# Altium PCB 打样.PcbDoc
Units mil, origin at the board's own origin, x right, y up, seen from the top; angles counter-clockwise.
Board outline 1675 x 2045 mil, 2 copper layers (Top Layer, Bottom Layer); 81 components, 0 nets, 333 pads, 96 vias.
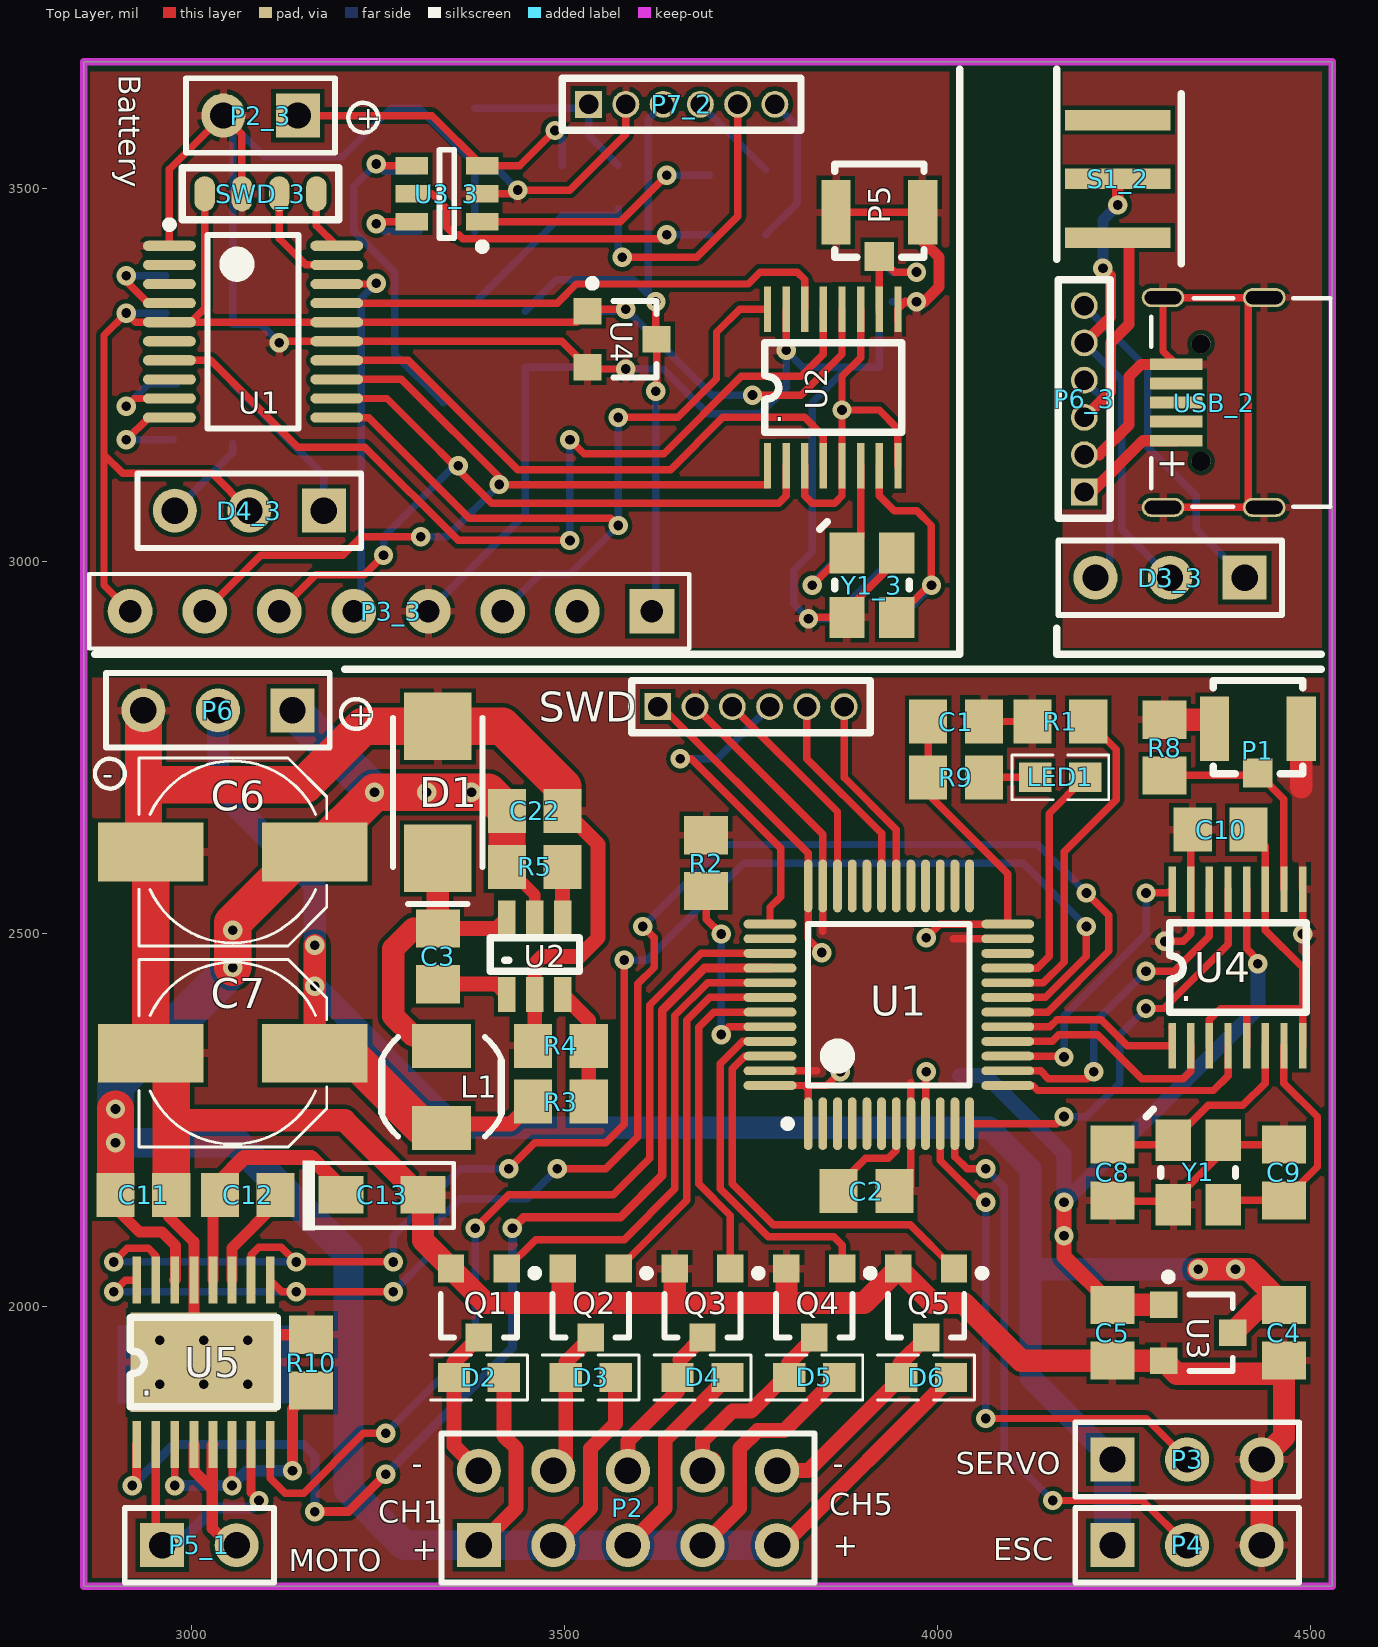
[diagram p0: Top Layer view]
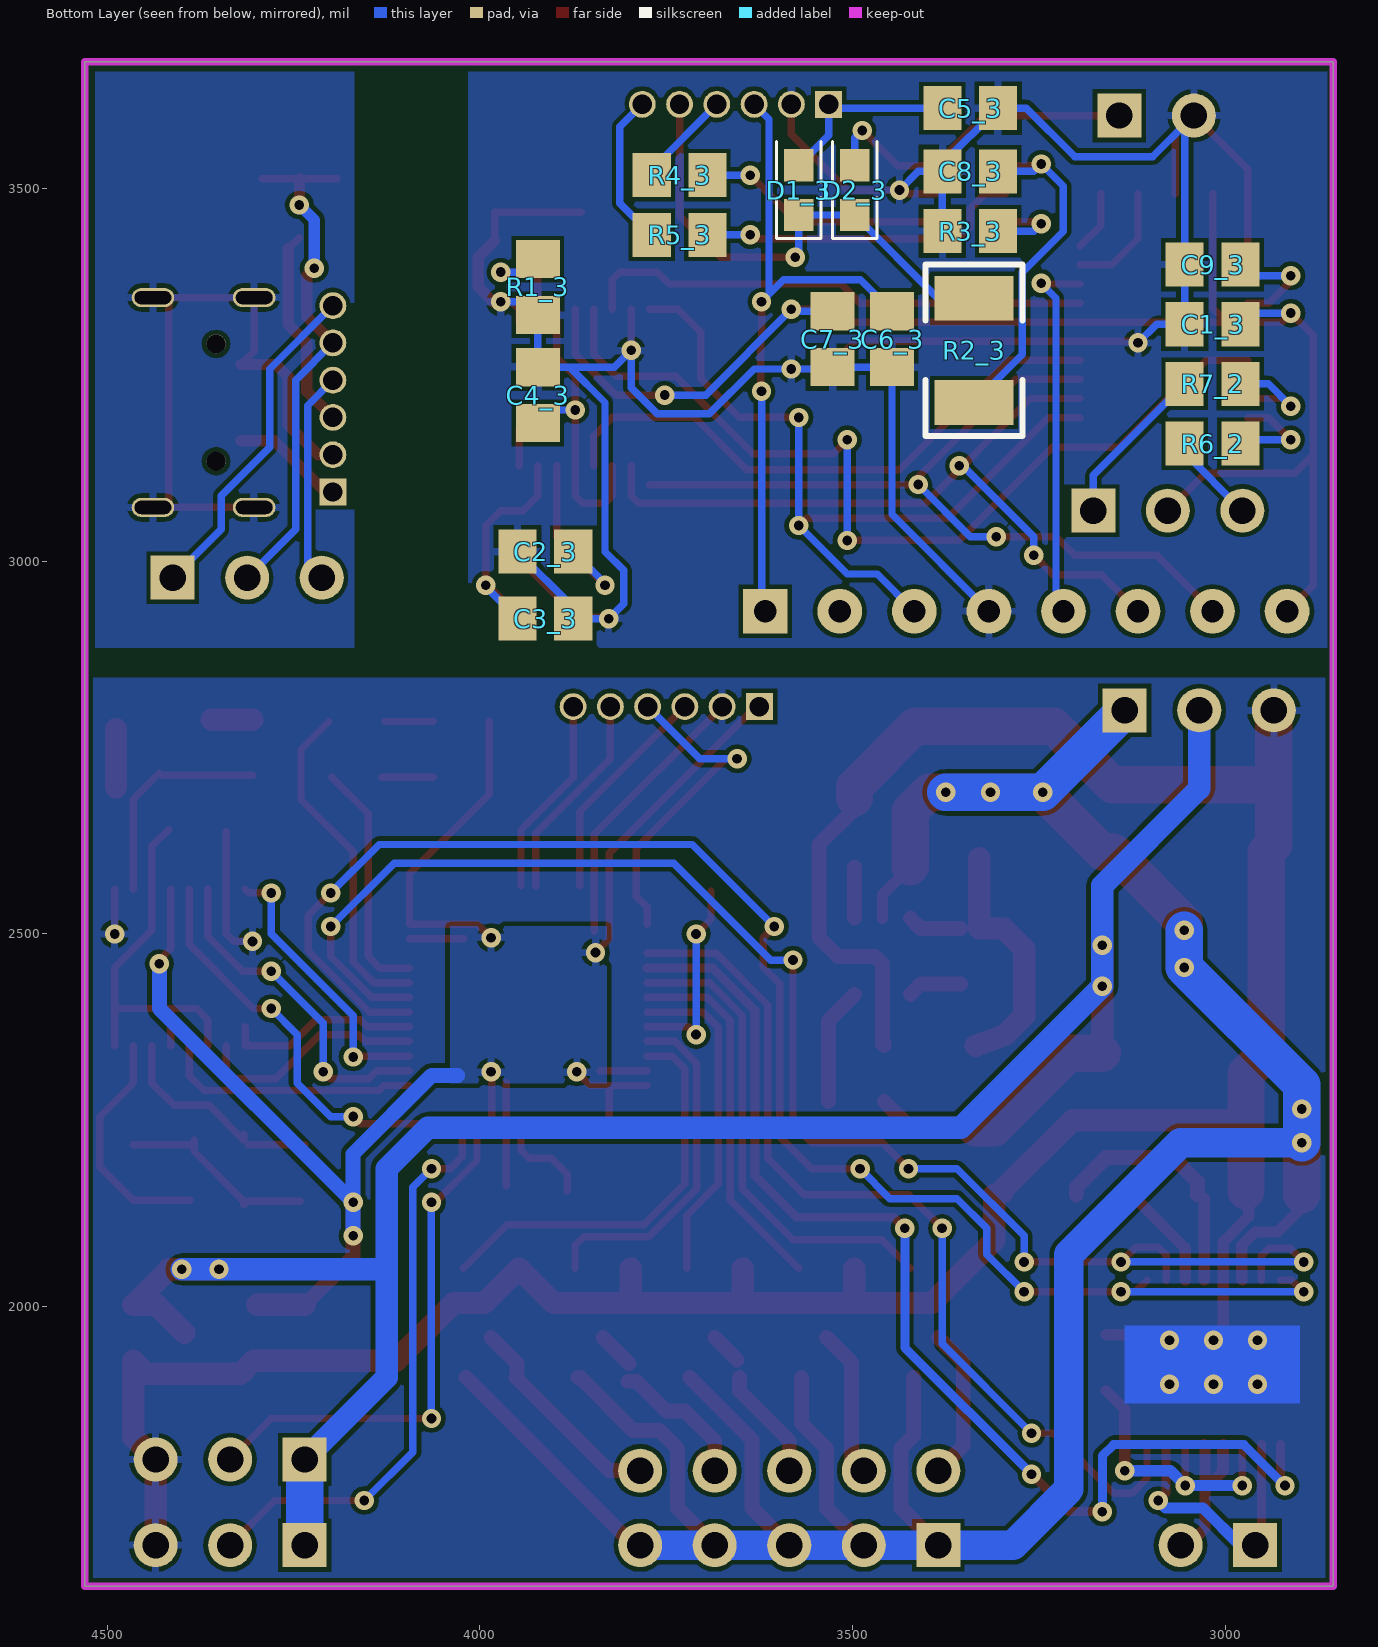
[diagram p1: Bottom Layer view, seen from below]

## Layer stack, top to bottom
Top Layer: signal copper 1.4
Dielectric: dielectric 12.6, FR-4, Dk 4.8
Bottom Layer: signal copper 1.4

## Board outline
2855,3670 4530,3670 4530,1625 2855,1625

## Design rules (kind name [scope] priority, off if disabled: settings)
Clearance [All] p1: gap=6
ComponentClearance [All] p1: gap=6 collisioncheckmode=3 verticalgap=6 showdistances=FALSE
PolygonConnect [All] p1: connectstyle=Relief reliefconductorwidth=10 reliefentries=4 polygonreliefangle="90 Angle"
RoutingVias [All] p1: holewidth=28 width=50 viastyle="Through Hole" minholewidth=28 minwidth=50 maxholewidth=28 maxwidth=50
ShortCircuit [All] p1: allowed=TRUE
SilkToSilkClearance [All] p1 off: silktosilkclearance=10
SilkscreenOverComponentPads [All] p1 off: minsilkscreentomaskgap=10
SolderMaskExpansion [All] p1: expansion=4
Width [All] p1: maxlimit=50 minlimit=6 preferedwidth=10 minimp=50.000000 maximp=50.000000 favimp=50.000000
24 further rules are at their usual default settings.

## Components (designator, comment, footprint, x,y, rotation, side; value= is the part's Value field where it differs from the comment)
C1 "106" 0805-2 4025,2785 r180 top
C1_3 "Cap" 0805-2 3017.16,3317.89 r0 bottom (schematic designator C1)
C2 "Cap" 0805-2 3905,2155 r0 top
C2_3 "Cap" 0805-2 3912.16,3012.89 r180 bottom (schematic designator C2)
C3 "103" 0805-2 3330,2470 r90 top
C3_3 "Cap" 0805-2 3912.16,2922.89 r0 bottom (schematic designator C3)
C4 "Cap" 0805-2 4465,1965 r270 top
C4_3 "Cap" 0805-2 3922.16,3222.89 r270 bottom (schematic designator C4)
C5 "Cap" 0805-2 4235,1965 r270 top
C5_3 "Cap" 0805-2 3342.16,3607.89 r180 bottom (schematic designator C5)
C6 "Cap Pol" C-RB-S6 3055,2610 r180 top
C6_3 "Cap" 0805-2 3447.16,3297.89 r270 bottom (schematic designator C6)
C7 "Cap Pol" C-RB-S6 3055,2340 r180 top
C7_3 "Cap" 0805-2 3527.16,3297.89 r270 bottom (schematic designator C7)
C8 "Cap" 0805-2 4235,2180 r90 top
C8_3 "Cap" 0805-2 3342.16,3522.89 r0 bottom (schematic designator C8)
C9 "Cap" 0805-2 4465,2180 r270 top
C9_3 "Cap" 0805-2 3017.16,3397.89 r0 bottom (schematic designator C9)
C10 "Cap" 0805-2 4380,2640 r0 top
C11 "Cap" 0805-2 2935,2150 r180 top
C12 "Cap" 0805-2 3075,2150 r0 top
C13 "Cap Pol" CAP-3216 3255,2150 r0 top
C22 "104" 0805-2 3460,2665 r180 top
D1 "D-Schottky" DIODE-SMA 3330,2690 r270 top
D1_3 "S4" SOD523 3572.16,3497.89 r270 bottom (schematic designator D1)
D2 "Diode" SOD523 3385,1905 r0 top
D2_3 "S4" SOD523 3497.16,3497.89 r270 bottom (schematic designator D2)
D3 "Diode" SOD523 3535,1905 r0 top
D3_3 "LED1" HDR3X1_A 4412.16,2977.89 r180 top (schematic designator D3)
D4 "Diode" SOD523 3685,1905 r0 top
D4_3 "LED1" HDR3X1_A 3177.16,3067.89 r180 top (schematic designator D4)
D5 "Diode" SOD523 3835,1905 r0 top
D6 "Diode" SOD523 3985,1905 r0 top
L1 "Inductor" l-SMD-4 3335,2295 r270 top
LED1 "red" 0603-1 4165,2710 r0 top
P1 "IPEX" U.FL-R-SMT 4430,2775 r0 top
P2 "Header 5X2" HDR5X2_A1 3385,1680 r0 top
P2_3 "Battery" HDR1X2 3142.16,3597.89 r180 top (schematic designator P2)
P3 "SERVO" HDR3X1_A 4235,1795 r0 top
P3_3 "PS2_Controller" HDR8X1_A 3217.16,2932.89 r180 top (schematic designator P3)
P4 "ESC" HDR3X1_A 4235,1680 r0 top
P5 "IPEX" U.FL-R-SMT 3922.16,3467.89 r0 top
P5_1 "Header 2" HDR2X1_A 2960,1680 r0 top (schematic designator P5)
P6 "Batter" HDR3X1_A 3135,2800 r180 top
P6_3 "Header 6" HDR6*1*1.27 4197.16,3217.89 r90 top (schematic designator P6)
P7_2 "Header 6" HDR6*1*1.27 3657.16,3612.89 r0 top (schematic designator P7)
Q1 "AO3400" SOT-23-3L 3385,2005 r180 top
Q2 "AO3400" SOT-23-3L 3535,2005 r180 top
Q3 "AO3400" SOT-23-3L 3685,2005 r180 top
Q4 "AO3400" SOT-23-3L 3835,2005 r180 top
Q5 "AO3400" SOT-23-3L 3985,2005 r180 top
R1 "Res1" 0805-2 4165,2785 r180 top
R1_3 "Res1" 0805-2 3922.16,3367.89 r90 bottom (schematic designator R1)
R2 "Res1" 0805-2 3690,2595 r270 top
R2_3 "Res1" 1210 3337.16,3282.89 r90 bottom (schematic designator R2)
R3 "Res1" 0805-2 3495,2275 r0 top
R3_3 "Res1" 0805-2 3342.16,3442.89 r180 bottom (schematic designator R3)
R4 "Res1" 0805-2 3495,2350 r180 top
R4_3 "Res1" 0805-2 3732.16,3517.89 r0 bottom (schematic designator R4)
R5 "Res1" 0805-2 3460,2590 r0 top
R5_3 "Res1" 0805-2 3732.16,3437.89 r0 bottom (schematic designator R5)
R6_2 "Res1" 0805-2 3017.16,3157.89 r0 bottom (schematic designator R6)
R7_2 "Res1" 0805-2 3017.16,3237.89 r0 bottom (schematic designator R7)
R8 "Res1" 0805-2 4305,2750 r270 top
R9 "Res1" 0805-2 4025,2710 r180 top
R10 "Res1" 0805-2 3160,1925 r90 top
S1_2 "SW-SPDT" SWITCH_A4 4327.16,3512.89 r270 top (schematic designator S1)
SWD "Header 6" HDR6*1*1.27 3750,2805 r0 top
SWD_3 "Header 4" HDR4X1X1.27 3092.16,3492.89 r0 top (schematic designator SWD)
U1 "STM32F103C8T6" STM-LQFP48_N 3935,2405 r90 top
U1 "STM32F030F4P6" STM-TSSOP20_N 3082.16,3307.89 r0 top
U2 "MP2359" TSOT23-6 3460,2470 r0 top
U2 "LT8920" "SSOP-16 LT8920" 3862.16,3232.89 r0 top
U3 "662K" SOT-23 4350,1965 r270 top
U3_3 "TP4057" SOT23-6 3342.16,3492.89 r180 top (schematic designator U3)
U4 "LT8920" "SSOP-16 LT8920" 4405,2455 r0 top
U4 "662K" SOT-23 3577.16,3297.89 r270 top
U5 "DRV8833PWP" "HTSSOP-16 DRV8833" 3015.94,1925.47 r0 top
USB_2 "microusb" MICROUSB_1 4527.16,3212.89 r90 top (schematic designator USB)
Y1 "12M" XTAL_3225 4350,2180 r270 top
Y1_3 "12M" XTAL_3225 3912.16,2967.89 r270 top (schematic designator Y1)

## Footprints (in the part's own frame and the unit in brackets; to place one, negate y for a bottom-side part, rotate by r counter-clockwise, add the part's x,y. Pads: shape width x height; smd on the part's side, far side on the other; paste and mask are expansions set on the pad)
0603-1 [mm] "贴?"
  rect 1.1x1 smd: 1(-0.85,0) 2(0.85,0)
  silkscreen extent -1.65,-0.76 1.65,0.76, body extent -1.14,-0.38 1.14,0.38, height 1
0805-2 [mm] "贴?"
  rect 1.3x1.5 smd: 1(-0.95,0) 2(0.95,0)
1210 [mil]
  rect 60x106.3 smd: 1(-70,0) 2(70,0)
  silkscreen extent -115,-65 115,65, body extent -65,-50 65,50, height 39
C-RB-S6 [mm]
  rect 3.6x2 smd: 1(-2.794,0) 2(2.794,0)
  silkscreen extent -3.2,-3.2 3.2,3.2
CAP-3216 [mil]
  rect 60x50 smd: 1(-55,0) 2(55,0)
  silkscreen extent -107,-48 96,46
DIODE-SMA [mm]
  rect 2.3x2.3 smd: 1(-2.25,0) 2(2.25,0)
  silkscreen extent -2.54,-1.52 3.81,1.52, body extent -2.92,-1.4 2.92,1.4, height 3
HDR1X2 [mm] "Connector; Header; 2 Position"
  rect 1.5x1.5 hole 0.9: 1(0,0)
  round 1.5 hole 0.9: 2(2.54,0)
  silkscreen extent -1.27,-1.27 3.81,1.27
HDR2X1_A [mm] "Connector; Heade"
  rect 1.5x1.5 hole 0.9: 1(0,0)
  round 1.5 hole 0.9: 2(2.54,0)
  silkscreen extent -1.27,-1.27 3.81,1.27
HDR3X1_A [mm] "Connector; Header; 3 Posi"
  rect 1.5x1.5 hole 0.9: 1(0,0)
  round 1.5 hole 0.9: 2(2.54,0) 3(5.08,0)
  silkscreen extent -1.27,-1.27 6.35,1.27
HDR4X1X1.27 [mm]
  oval 0.7x1.2 smd: 1(-1.905,0) 2(-0.635,0) 3(0.635,0) 4(1.905,0)
  silkscreen extent -2.67,-0.89 2.67,0.89
HDR5X2_A1 [mm] "Connector; Header;"
  rect 1.5x1.5 hole 0.9: 1(0,0)
  round 1.5 hole 0.9: 2(0,2.54) 3(2.54,0) 4(2.54,2.54) 5(5.08,0) 6(5.08,2.54) 7(7.62,0) 8(7.62,2.54) 9(10.16,0) 10(10.16,2.54)
  silkscreen extent -1.27,-1.27 11.43,3.81
HDR6*1*1.27 [mil]
  rect 36x36 hole 26: 1(-125,0)
  round 36 hole 26: 2(-75,0) 3(-25,0) 4(25,0) 5(75,0) 6(125,0)
  silkscreen extent -160,-35 160,35
HDR8X1_A [mil] "2.54mm"
  rect 60x60 hole 30: 1(-400,0)
  round 60 hole 30: 2(-300,0) 3(-200,0) 4(-100,0) 5(0,0) 6(100,0) 7(200,0) 8(300,0)
  silkscreen extent -450,-50 355,50
"HTSSOP-16 DRV8833" [mm] "DRV88"
  rect 0.3x1.6 smd: 1(-2.286,-2.8) 2(-1.636,-2.8) 3(-0.986,-2.8) 4(-0.336,-2.8) 5(0.314,-2.8) 6(0.964,-2.8) 7(1.614,-2.8) 8(2.264,-2.8) 9(2.264,2.8) 10(1.614,2.8) 11(0.964,2.8) 12(0.314,2.8) 13(-0.336,2.8) 14(-0.986,2.8) 15(-1.636,2.8) 16(-2.286,2.8)
  rect 5x3.4 smd: 17(0,0)
  silkscreen extent -2.5,-1.52 2.5,1.52
l-SMD-4 [mm] "C"
  rect 1.5x2 smd: 1(-1.397,0) 2(1.397,0)
  silkscreen extent -1.69,-2.04 1.69,2.06
MICROUSB_1 [mm] "5P母座"
  rect 0.4x1.8 smd: 1(-1.3,5.25) 2(-0.65,5.25) 3(0,5.25) 4(0.65,5.25) 5(1.3,5.25)
  oval 0.65x1.45 hole 0.45 slot 1.25 at 90 deg: 6(-3.575,2.25) 6(-3.575,5.7) 6(3.575,2.25) 6(3.575,5.7)
  round 0.65 hole 0.65 unplated: ""(-2,4.4) ""(2,4.4)
  silkscreen extent -3.56,0 3.56,6.1
SOD523 [mm] "D1N5819_0603封?"
  rect 1.1x1 smd: 1(-0.85,0) 2(0.85,0)
  silkscreen extent -1.65,-0.76 1.65,0.76, body extent -1.14,-0.38 1.14,0.38, height 1
SOT23-6 [mm] "Max"
  rect 1.1x0.6 smd: 1(-1.2,0.95) 2(-1.2,0) 3(-1.2,-0.95) 4(1.2,-0.95) 5(1.2,0) 6(1.2,0.95)
  silkscreen extent -1.33,-1.5 0.25,1.92, body extent -0.87,-1.5 0.87,1.5, height 1.45
SOT-23 [mm]
  rect 0.9x0.95 smd: 1(-0.95,-1.175) 2(0.95,-1.175) 3(0,1.175)
  silkscreen extent -2.03,-1.14 1.3,1.18
SOT-23-3L [mm] "AO3400"
  rect 0.9x0.95 smd: D(0,1.175) G(-0.95,-1.175) S(0.95,-1.175)
  silkscreen extent -2.03,-1.14 1.3,1.18
"SSOP-16 LT8920" [mil]
  rect 9.84x61.02 smd: 1(-90,-105) 2(-65,-105) 3(-40,-105) 4(-15,-105) 5(10,-105) 6(35,-105) 7(60,-105) 8(85,-105) 9(85,105) 10(60,105) 11(35,105) 12(10,105) 13(-15,105) 14(-40,105) 15(-65,105) 16(-90,105)
  silkscreen extent -93,-60 90,60
STM-LQFP48_N [mm] "QFP, 48-Leads, Body 7x7mm, Pitch 0.5mm, IPC Medium Density"
  oval 1.8x0.3 smd: 1(-4.05,2.75) 2(-4.05,2.25) 3(-4.05,1.75) 4(-4.05,1.25) 5(-4.05,0.75) 6(-4.05,0.25) 7(-4.05,-0.25) 8(-4.05,-0.75) 9(-4.05,-1.25) 10(-4.05,-1.75) 11(-4.05,-2.25) 12(-4.05,-2.75) 25(4.05,-2.75) 26(4.05,-2.25) 27(4.05,-1.75) 28(4.05,-1.25) 29(4.05,-0.75) 30(4.05,-0.25) 31(4.05,0.25) 32(4.05,0.75) 33(4.05,1.25) 34(4.05,1.75) 35(4.05,2.25) 36(4.05,2.75)
  oval 0.3x1.8 smd: 13(-2.75,-4.05) 14(-2.25,-4.05) 15(-1.75,-4.05) 16(-1.25,-4.05) 17(-0.75,-4.05) 18(-0.25,-4.05) 19(0.25,-4.05) 20(0.75,-4.05) 21(1.25,-4.05) 22(1.75,-4.05) 23(2.25,-4.05) 24(2.75,-4.05) 37(2.75,4.05) 38(2.25,4.05) 39(1.75,4.05) 40(1.25,4.05) 41(0.75,4.05) 42(0.25,4.05) 43(-0.25,4.05) 44(-0.75,4.05) 45(-1.25,4.05) 46(-1.75,4.05) 47(-2.25,4.05) 48(-2.75,4.05)
  silkscreen extent -4.17,-2.75 2.75,3.57, body extent -3.5,-3.5 3.5,3.5, height 1.6
STM-TSSOP20_N [mm] "SOP, 20-Leads, Body 6.6x4.5mm, Pitch 0.65mm, IPC Medium Density"
  oval 1.8x0.35 smd: 1(-2.85,2.925) 2(-2.85,2.275) 3(-2.85,1.625) 4(-2.85,0.975) 5(-2.85,0.325) 6(-2.85,-0.325) 7(-2.85,-0.975) 8(-2.85,-1.625) 9(-2.85,-2.275) 10(-2.85,-2.925) 11(2.85,-2.925) 12(2.85,-2.275) 13(2.85,-1.625) 14(2.85,-0.975) 15(2.85,-0.325) 16(2.85,0.325) 17(2.85,0.975) 18(2.85,1.625) 19(2.85,2.275) 20(2.85,2.925)
  silkscreen extent -2.97,-3.3 1.55,3.77, body extent -2.25,-3.3 2.25,3.3, height 1.2
SWITCH_A4 [mm] "5.8*5.8m"
  rect 0.7x3.6 smd: 1(-2,-2.159) 2(0,-2.159) 3(2,-2.159)
  silkscreen extent -2.9,0 2.9,0
TSOT23-6 [mm] "MP2359"
  rect 0.6x1.2 smd: 1(-0.95,-1.3) 2(0,-1.3) 3(0.95,-1.3) 4(0.95,1.3) 5(0,1.3) 6(-0.95,1.3)
  silkscreen extent -1.52,-0.51 1.52,0.64
U.FL-R-SMT [mm] "IPEX插?"
  rect 1x1 smd: 1(0,-1.5)
  rect 1x2.2 smd: 2(-1.475,0) 3(1.475,0)
  silkscreen extent -1.52,-1.52 1.52,1.65
XTAL_3225 [mm]
  rect 1.4x1.2 smd: 1(-1.1,-0.85) 2(1.1,-0.85) 3(1.1,0.85) 4(-1.1,0.85)
  silkscreen extent -2.16,-1.78 0.13,1.27

## Part data
C1 C3 C22: library part "Cap Semi", "Capacitor (Semiconductor SIM Model)"
C1_3 C2_3 C3_3 C4_3 C5_3 C6_3 C7_3 C8_3 C9_3: "ÎÞ¼"
C2 C4 C5 C8 C9 C10 C11 C12: "无?"
C6 C7 C13: "极性"
D1: "Ð¤Ì"
D1_3 D2_3: library part Diode, "Default Diode"
D2 D3 D4 D5 D6: "二极管"
D3_3 D4_3: "˫ɫLED"
L1: "电感"
LED1: library part LED3, "Typical BLUE SiC LED"
P1 P5: "U.FL-R-SMT"
P2 P5_1 SWD_3: "接插件"
P2_3: library part "Header 2", "Header, 2-Pin"
P3 P4 P6: library part "Header 3", "接插件"
P6_3 P7_2 SWD: "接?"
Q1 Q2 Q3 Q4 Q5: library part MOSFET-N, "N-Channel MOSFET"
R1 R1_3 R2 R2_3 R3 R3_3 R4 R4_3 R5 R5_3 R6_2 R7_2 R9: "ÌùÆ"
R8: "贴?"
R10: "贴片"
S1_2: "开关"
U1: "STM32 ARM-based 32-bit MCU with 64 Kbytes Flash, 48-pin LQFP, Industrial Temperature"
U1: "ARM Cortex-M0 32-bit MCU, 16 KB Flash, 4 KB Internal RAM, 15 I/Os, 20-pin TSSOP, -40 to 85 degC, Tube"
U3_3: "l锂电?"
U5: "DRV8833_HTSSOP封装"
Y1: library part XTAL-4PIN, "ÌùÆ"
Y1_3: library part XTAL-4PIN, "贴片?"

## Via types
v1: diameter 25.98, hole 12.99, Top Layer to Bottom Layer, 53 vias
v2: diameter 25.98, hole 12.99, Top Layer to Bottom Layer, tented both sides, 37 vias
v3: diameter 25.98, hole 12.99, Top Layer to Bottom Layer, tented top, 6 vias

## Nets (pads, with @x,y where several pads share a name; then routed paths per layer and width w, separated by ;. In a path a pad name is that pad's centre, name@x,y a point inside that pad or via, vN(x,y) a via of type N, cw(c..) or ccw(c..) an arc to the next point about the centre after c; other vN are vias at no path point)
pads on no net: C1.1 C1.2 C1_3.1 C1_3.2 C2.1 C2.2 C2_3.1 C2_3.2 C3.1 C3.2 C3_3.1 C3_3.2 C4.1 C4.2 C4_3.1 C4_3.2 C5.1 C5.2 C5_3.1 C5_3.2 C6.1 C6.2 C6_3.1 C6_3.2 C7.1 C7.2 C7_3.1 C7_3.2 C8.1 C8.2 C8_3.1 C8_3.2 C9.1 C9.2 C9_3.1 C9_3.2 C10.1 C10.2 C11.1 C11.2 C12.1 C12.2 C13.1 C13.2 C22.1 C22.2 D1.1 D1.2 D1_3.1 D1_3.2 D2.1 D2.2 D2_3.1 D2_3.2 D3.1 D3.2 D3_3.1 D3_3.2 D3_3.3 D4.1 D4.2 D4_3.1 D4_3.2 D4_3.3 D5.1 D5.2 D6.1 D6.2 L1.1 L1.2 LED1.1 LED1.2 P1.1 P1.2 P1.3 P2.1 P2.2 P2.3 P2.4 P2.5 P2.6 P2.7 P2.8 P2.9 P2.10 P2_3.1 P2_3.2 P3.1 P3.2 P3.3 P3_3.1 P3_3.2 P3_3.3 P3_3.4 P3_3.5 P3_3.6 P3_3.7 P3_3.8 P4.1 P4.2 P4.3 P5.1 P5.2 P5.3 P5_1.1 P5_1.2 P6.1 P6.2 P6.3 P6_3.1 P6_3.2 P6_3.3 P6_3.4 P6_3.5 P6_3.6 P7_2.1 P7_2.2 P7_2.3 P7_2.4 P7_2.5 P7_2.6 Q1.D Q1.G Q1.S Q2.D Q2.G Q2.S Q3.D Q3.G Q3.S Q4.D Q4.G Q4.S Q5.D Q5.G Q5.S R1.1 R1.2 R1_3.1 R1_3.2 R2.1 R2.2 R2_3.1 R2_3.2 R3.1 R3.2 R3_3.1 R3_3.2 R4.1 R4.2 R4_3.1 R4_3.2 R5.1 R5.2 R5_3.1 R5_3.2 R6_2.1 R6_2.2 R7_2.1 R7_2.2 R8.1 R8.2 R9.1 R9.2 R10.1 R10.2 S1_2.1 S1_2.2 S1_2.3 SWD.1 SWD.2 SWD.3 SWD.4 SWD.5 SWD.6 SWD_3.1 SWD_3.2 SWD_3.3 SWD_3.4 U1.1 U1.2 U1.3 U1.4 U1.5 U1.6 U1.7 U1.8 U1.9 U1.10 U1.11 U1.12 U1.13 U1.14 U1.15 U1.16 U1.17 U1.18 U1.19 U1.20 U1.21 U1.22 U1.23 U1.24 U1.25 U1.26 U1.27 U1.28 U1.29 U1.30 U1.31 U1.32 U1.33 U1.34 U1.35 U1.36 U1.37 U1.38 U1.39 U1.40 U1.41 U1.42 U1.43 U1.44 U1.45 U1.46 U1.47 U1.48 U2.1 U2.2 U2.3 U2.4 U2.5 U2.6 U2.7 U2.8 U2.9 U2.10 U2.11 U2.12 U2.13 U2.14 U2.15 U2.16 U3.1 U3.2 U3.3 U3_3.1 U3_3.2 U3_3.3 U3_3.4 U3_3.5 U3_3.6 U4.1 U4.2 U4.3 U4.4 U4.5 U4.6 U4.7 U4.8 U4.9 U4.10 U4.11 U4.12 U4.13 U4.14 U4.15 U4.16 U5.1 U5.2 U5.3 U5.4 U5.5 U5.6 U5.7 U5.8 U5.9 U5.10 U5.11 U5.12 U5.13 U5.14 U5.15 U5.16 U5.17 USB_2. USB_2.1 USB_2.2 USB_2.3 USB_2.4 USB_2.5 USB_2.6 Y1.1 Y1.2 Y1.3 Y1.4 Y1_3.1 Y1_3.2 Y1_3.3 Y1_3.4
copper on no net: | length 57101
  Top Layer w10: v1(2895,2020) 2910.71,2035.71 2925.94,2035.71 ; v1(2895,2060) 2913.2,2078.2 2941.8,2078.2 2951.54,2068.46 2951.54,2035.71 ; v2(2912.16,3162.89) 2942,3192.73 2969.95,3192.73 ; v2(2912.16,3207.89) 2922.59,3218.32 2969.95,3218.32 ; v2(2912.16,3382.89) 2912.16,3375.82 2941.7,3346.28 2969.95,3346.28 ; 2917.16,2932.89 2882.16,2967.89 2882.16,3142.89 ; 2969.95,3269.5 3025.54,3269.5 3142.16,3152.89 3232.16,3152.89 3357.16,3027.89 v2(3507.16,3027.89) ; 2969.95,3423.05 2969.95,3525.69 3042.16,3597.89 3067.16,3572.89 3067.16,3492.89 ; v1(2977.13,1760) 2977.13,1815.24 ; 3017.16,2932.89 3092.16,3007.89 3202.16,3007.89 3227.16,3032.89 v2(3307.16,3032.89) ; 3017.16,3492.89 3017.16,3339.64 2998.2,3320.69 ; v1(3053.9,1760) 3053.9,1815.24 ; 3077.16,3067.89 3027.16,3117.89 2907.16,3117.89 2882.16,3142.89 ; 3079.49,2035.71 3079.49,2069.49 3090,2080 3120,2080 v1(3140,2060) v1(3270,2060) ; 3105.08,1815.24 3105.08,1769.92 3125,1750 3150,1750 3230,1830 v1(3260,1830) ; 3105.08,2035.71 3120.79,2020 v1(3140,2020) v1(3270,2020) ; 3117.16,2932.89 3166.16,2981.89 3231.16,2981.89 v2(3257.16,3007.89) ; 3117.16,3492.89 3117.16,3432.89 3152.59,3397.46 3194.36,3397.46 ; v2@3119.36,3295.09 3194.36,3295.09 3496.29,3295.09 3530.9,3260.49 ; 3142.16,3597.89 3321.8,3597.89 3389.4,3530.29 3439.56,3530.29 v2(3487.16,3577.89) ; 3167.16,3492.89 3167.16,3450.25 3194.36,3423.05 ; 3194.36,3192.73 3237.31,3192.73 3372.16,3057.89 3562.16,3057.89 v2(3572.16,3047.89) ; 3194.36,3218.32 3261.72,3218.32 3402.16,3077.89 3787.16,3077.89 3797.16,3087.89 3797.16,3127.89 ; 3194.36,3243.91 3281.13,3243.91 3422.16,3102.89 3772.16,3102.89 ; 3194.36,3269.5 3290.54,3269.5 3437.16,3122.89 3642.16,3122.89 3712.16,3192.89 3822.16,3192.89 3847.16,3167.89 3847.16,3127.89 ; 3194.36,3346.28 3489.91,3346.28 3515.51,3371.88 3746.15,3371.88 3762.16,3387.89 3812.16,3387.89 3822.16,3377.89 3822.16,3337.89 ; 3194.36,3371.87 3233.18,3371.87 ; v2@3249.76,3455.49 3294.91,3455.49 ; v2@3249.76,3530.29 3294.91,3530.29 ; 3294.91,3492.89 3322.16,3492.89 3342.16,3472.89 3342.16,3447.89 3352.16,3437.89 3357.98,3437.89 3363.19,3432.68 3631.94,3432.68 v2(3637.16,3437.89) ; v1(3380,2105) 3425,2150 3565,2150 3614,2199 3614,2404.71 3683.19,2473.9 3775.55,2473.9 ; 3389.4,3455.49 3574.76,3455.49 v2(3637.16,3517.89) ; 3389.4,3492.89 3432.16,3492.89 v2(3437.16,3497.89) 3507.16,3497.89 3582.16,3572.89 3582.16,3612.89 ; 3422.4,2051.26 3461.14,2090 3580,2090 3648,2158 3648,2390.63 3691.9,2434.53 3775.55,2434.53 ; v1(3425,2185) 3460,2220 3555,2220 3580,2245 v1(3580,2465) ; v1(3490,2185) 3555,2185 3598,2228 3598,2433 3620,2455 3620,2495 v1(3605,2510) ; v2(3507.16,3162.89) 3526.15,3143.9 3633.16,3143.9 3737.16,3247.89 3817.16,3247.89 3847.16,3277.89 3847.16,3337.89 ; 3530.9,3335.29 3516.29,3320.69 3194.36,3320.69 2998.2,3320.69 ; 3533.5,3257.89 v2(3582.16,3257.89) ; 3533.5,3337.89 v2(3582.16,3337.89) ; v2(3572.16,3192.89) 3652.16,3192.89 3703.78,3244.52 3703.78,3306.89 3734.78,3337.89 3772.16,3337.89 ; 3572.4,2051.26 3664,2142.86 3664,2384 3694.84,2414.84 3775.55,2414.84 ; v2(3577.16,3407.89) 3677.16,3407.89 3732.16,3462.89 3732.16,3612.89 ; 3622.16,3299.15 v2(3622.16,3347.89) ; v2@3623.42,3229.15 3623.42,3297.89 ; 3630,2805 3826.73,2608.27 3826.73,2564.45 3826.73,2493.27 v1(3845,2475) ; v1(3655,2735) 3670,2735 3790,2615 3790,2550 3775.55,2535.55 3775.55,2513.27 ; 3675,2805 3846.42,2633.58 3846.42,2564.45 3846.42,2503.58 ; 3690,2557.6 3690,2520 v1(3710,2500) ; v1(3710,2365) 3720.47,2375.47 3775.55,2375.47 ; 3722.4,2051.26 3722.4,2122.34 3680,2164.75 3680,2375 3700.16,2395.16 3775.55,2395.16 ; 3725,2805 3866.1,2663.9 3866.1,2564.45 ; v2(3752.16,3222.89) 3817.16,3222.89 3872.16,3277.89 3872.16,3337.89 ; 3775.55,2296.73 3821.73,2296.73 ; 3775.55,2316.42 3838.58,2316.42 ; 3775.55,2336.1 3741.8,2336.1 3725,2319.3 3725,2165 3780,2110 3963.66,2110 4022.4,2051.26 ; 3775.55,2355.79 3738.86,2355.79 3709,2325.93 3709,2158.37 3773.37,2094 3860.8,2094 3872.4,2082.4 3872.4,2051.26 ; v2(3797.16,3282.89) 3797.16,3337.89 ; 3822.16,3127.89 3822.16,3087.89 3832.16,3077.89 3862.16,3077.89 3872.16,3087.89 3872.16,3127.89 v2(3872.16,3202.89) ; 3825,2805 3825,2735 3925.16,2634.84 3925.16,2564.45 ; 3826.73,2245.55 3826.73,2291.73 3821.73,2296.73 ; v2@3828.85,2924.58 3878.69,2924.58 ; v2(3832.16,2967.89) 3875.46,3011.2 ; 3864.09,3467.89 3980.23,3467.89 3980.23,3429.82 ; v1(3870,2315) 3851.73,2296.73 3821.73,2296.73 ; 3873.69,2929.58 3940.62,2996.51 ; 3875,2805 3875,2709.84 3944.84,2640 3944.84,2564.45 ; 3882.6,2155 3882.6,2177.6 3904.12,2199.12 3934.12,2199.12 3944.84,2209.84 3944.84,2245.55 ; 3897.16,3032.89 3897.16,3127.89 ; 3897.16,3337.89 3897.16,3272.89 3872.16,3247.89 v2(3872.16,3202.89) ; 3922.16,3127.89 3922.16,3087.89 3942.16,3067.89 3972.16,3067.89 3992.16,3047.89 v2(3992.16,2967.89) ; 3922.16,3337.89 3922.16,3408.84 3943.1,3387.89 v2(3972.16,3387.89) ; 3945.62,2924.58 v2@3987.16,2966.12 ; 3947.16,3127.89 3947.16,3177.89 3922.16,3202.89 v2(3872.16,3202.89) ; 3947.16,3322.89 3947.16,3337.89 3957.16,3347.89 ; 3964.53,2162.13 3964.53,2245.55 3964.53,2300.47 ; 3984.21,2245.55 v1@3984.21,2314.21 ; v1(3985,2495) 4003.27,2513.27 4094.45,2513.27 4094.45,2580.55 3987.6,2687.4 3987.6,2710 3987.6,2785 ; 4003.9,2245.55 4003.9,2196.1 4060,2140 v1(4065,2140) ; 4021.42,2493.58 4094.45,2493.58 ; 4023.58,2245.55 4023.58,2201.42 4040,2185 v1(4065,2185) ; 4043.27,2245.55 4160.55,2245.55 v1(4170,2255) ; 4062.4,2710 4131.54,2710 ; 4062.4,2785 4127.6,2785 ; v1(4065,1850) 4280,1850 4335,1795 ; 4094.45,2296.73 4128.27,2296.73 4135,2290 4370,2290 4390,2310 4390,2350 ; 4094.45,2316.42 4138.58,2316.42 4149,2306 4201,2306 v1(4210,2315) ; 4094.45,2336.1 v1@4168.9,2336.1 ; 4094.45,2355.79 4153.92,2355.79 4163.14,2365 4215,2365 4274,2306 4330,2306 4340,2316 4340,2350 ; 4094.45,2375.47 4150.98,2375.47 4160.51,2385 4220,2385 4255,2350 4315,2350 4315,2375 4314.53,2375.47 ; 4094.45,2395.16 4148.04,2395.16 4230,2477.12 4230,2525 v1(4200,2555) ; 4094.45,2414.84 4145.1,2414.84 4200,2469.75 v1(4200,2510) ; 4094.45,2434.53 4142.15,2434.53 4170,2462.37 4170,2610 4240,2680 4240,2747.4 4202.4,2785 ; 4094.45,2454.21 4134.21,2454.21 4150,2470 4150,2661.54 4198.46,2710 ; v1(4155,1740) 4275,1740 4335,1680 ; 4192.16,3512.89 4242.16,3512.89 4292.16,3512.89 ; 4197.16,3092.89 4207.16,3092.89 ; 4235,2217.4 4310.63,2217.4 ; 4240.91,2141.69 4316.54,2141.69 ; 4242.16,3434.15 4257.16,3419.15 ; v1(4280,2400) 4304,2400 4390,2486 4390,2560 ; v1(4280,2450) 4318,2450 4365,2497 4365,2560 ; v1(4280,2555) 4310,2555 4315,2560 ; 4302.75,3072.14 4417.16,3072.14 4417.16,3353.64 4302.75,3353.64 4302.75,3281.79 4320.46,3264.07 ; v1(4305,2490) 4330,2490 4340,2500 4340,2560 4340,2637.4 ; 4305,2712.6 4426.65,2712.6 ; 4316.54,2136.69 4316.54,2141.69 ; 4316.54,2231.54 4316.54,2223.31 4363.23,2270 4410,2270 4440,2300 4440,2350 ; 4365,2350 4365,2385 4380,2400 4415,2400 ; 4383.46,2223.31 4383.46,2208.62 4316.54,2141.69 ; 4389.37,2142.6 4465,2142.6 4510,2187.6 4510,2255 4465,2300 4465,2350 ; 4389.37,2217.4 4465,2217.4 ; 4415,2350 4415,2400 ; 4415,2560 4415,2480 4430,2465 v1(4430,2460) ; 4417.4,2640 4440,2617.4 4440,2560 4440,2505 4490,2455 4490,2400 ; 4430,2715.94 4465,2680.94 4465,2560 ; 4490,2350 4490,2400 ; v1(4490,2500) 4490,2560 ; 2882.16,3142.89 2882.16,3302.89 v2(2912.16,3332.89) 2924.36,3320.69 2969.95,3320.69 2998.2,3320.69 ; 3875.46,3011.2 3878.69,3014.43 3878.69,3011.2 3875.46,3011.2 ; 4415,2400 4490,2400
  Top Layer w12: v1(2920,1760) 2925.94,1765.94 2925.94,1815.24 ; 2951.54,1815.24 2951.54,1688.46 2960,1680 ; 3079.49,1815.24 3079.49,1750.51 v1(3090,1740) ; v1(3165,1725) 3210,1725 v1(3260,1775) ; v1(3430,2105) 3445,2120 3575,2120 3631,2176 3631,2397.67 3687.54,2454.21 3775.55,2454.21 ; 3957.16,3347.89 v2(3972.16,3347.89)
  Top Layer w15: 2902.6,2137.4 2897.6,2132.4 2930,2100 2960,2100 2978.03,2081.97 2978.03,2036.61 2977.13,2035.71 ; 2972.4,2155 2968.7,2151.3 2968.7,2121 3002.72,2086.98 3002.72,1938.7 ; 3028.31,1815.24 3027.41,1814.33 3027.41,1755 ; 3028.31,2035.71 3028.31,2145.71 ; 3052.87,1962.4 3160,1962.4 ; 3053.9,2035.71 3053.9,2078.9 3112.4,2137.4 ; 3060,1670 3037.5,1692.5 3027.41,1702.59 3027.41,1755 ; v1(3135,1780) 3135,1862.6 3160,1887.6 ; 3422.6,2590 3460,2552.6 3460,2521.18 ; v2(3972.16,3347.89) 3982.16,3347.89 4002.16,3367.89 4002.16,3407.89 3980.23,3429.82 ; 4197.16,3142.89 4217.16,3142.89 4257.16,3182.89 4257.16,3247.89 4273.34,3264.07 4320.46,3264.07 ; 4197.16,3192.89 4232.16,3227.89 4232.16,3292.89 4257.16,3317.89 4257.16,3419.15 ; 4197.16,3292.89 4232.16,3327.89 4232.16,3382.89 v2(4222.16,3392.89) ; 4207.16,3092.89 4275.98,3161.71 4320.46,3161.71 ; v2(4242.16,3477.89) 4242.16,3512.89 ; 3003.62,1778.79 3003.62,1814.33 3002.72,1815.24 3002.72,1779.69 3003.62,1778.79 ; 3003.62,1778.79 3027.41,1755
  Top Layer w20: 3037.6,2150 3037.6,2167.6 3070,2200 3160,2200 3200,2160 3200,2150 ; 3295,2150 3310,2150 ; 3335,2245 3427.6,2245 3457.6,2275 ; 3355,2432.6 3408.82,2432.6 3422.6,2418.82 ; 3355,2507.4 3408.82,2507.4 3422.6,2521.18 ; 3371.54,1780 3385,1780 3351.54,1813.46 3351.54,1905 3351.54,1925.28 3385,1958.74 ; 3385,1680 3435,1730 3435,1810 3418.46,1826.54 3418.46,1905 ; 3457.6,2350 3457.6,2352.94 ; 3460,2352.4 3460,2418.82 3460,2460 3470,2470 3520,2470 3545,2495 3545,2620.15 3500.15,2665 3497.4,2665 3497.4,2682.6 ; 3485,1680 3535,1730 3535,1810 3568.46,1843.46 3568.46,1905 ; 3485,1780 3501.54,1796.54 3501.54,1905 3501.54,1925.28 3535,1958.74 ; 3497.4,2418.82 3532.4,2383.82 3532.4,2350 3532.4,2275 ; 3497.4,2521.18 3497.4,2590 ; 3585,1680 3635,1730 3635,1821.54 3718.46,1905 ; 3585,1780 3585,1820 3651.54,1886.54 3651.54,1905 ; 3655,1928.74 3685,1958.74 ; 3685,1680 3735,1730 3735,1810 3759,1834 3794.5,1834 3865.5,1905 3868.46,1905 ; 3700,1795 3685,1780 3685,1820 3725,1860 3750,1860 3790,1900 3801.54,1900 ; 3785,1680 3793.46,1680 4018.46,1905 ; 3785,1780 3826.54,1780 3950,1903.46 ; 3800,1923.74 3835,1958.74 ; 3951.54,1905 3950,1903.46 ; 3985,1958.74 3950,1923.74 3950,1903.46 ; v1(4170,2140) v1(4170,2095) 4170,2067.4 4235,2002.4
  Top Layer w30: 2972.4,2250 3205,2250 3300,2155 ; 3165,2340 v1(3165,2430) v1(3165,2485) ; 3310,2150 3310,2088.86 3347.6,2051.26 3393.86,2005 3647.6,2005 ; 3327.4,2507.4 3297.4,2507.4 3270,2480 3270,2390 3295.62,2364.38 3335,2350 ; 3330,2507.4 3330,2601.42 ; 3497.6,2007.6 3497.6,2051.26 ; 3647.6,2051.26 3647.6,2005 ; 3797.6,2007.4 3797.6,2051.26 ; 4235,2002.4 4298.74,2002.4 ; 4298.74,1927.6 4235,1927.6 4112.4,1927.6 4035,2005 3993.86,2005 3947.6,2051.26 3901.34,2005 3647.6,2005 ; 4303.74,1927.6 4321.34,1910 4447.4,1910 4465,1927.6 4465,1825 4435,1795 4435,1680 ; 4305,2787.4 4359.53,2787.4 ; v1(4350,2050) v1(4400,2050) 4417.4,2050 4465,2002.4 4433.66,2002.4 4396.26,1965 ; 4488.07,2696.93 4488.07,2775
  Top Layer w50: 2897.6,2150 v2(2897.6,2220) v2(2897.6,2265.2) ; 2935,2800 2935,2700 ; 2972.4,2155 2972.4,2250 2972.4,2312.6 2945,2340 2945,2610 2935,2620 2935,2700 ; v1(3055,2455) v1(3055,2505) 3055,2515 3150,2610 ; 3165,2340 3210,2340 3310,2240 3335,2240 ; 3165,2610 v1(3245,2690) 3397.6,2690 3422.6,2665 3422.6,2590 ; 3497.4,2682.6 3497.4,2697.6 3416.42,2778.58 3330,2778.58 3230,2778.58 3151.42,2700 2935,2700
  Bottom Layer w10: v1(2895,2020) v1(3140,2020) ; v1(2895,2060) v1(3140,2060) ; v2(2912.16,3162.89) 2974.76,3162.89 ; v2(2912.16,3207.89) 2942.16,3237.89 2979.76,3237.89 ; v2(2912.16,3332.89) 2964.76,3332.89 ; v2(2912.16,3382.89) 2964.76,3382.89 ; 2977.16,3067.89 3054.56,3145.29 3054.56,3157.89 ; 3054.56,3237.89 3177.16,3115.29 3177.16,3067.89 ; v2(3117.16,3292.89) 3092.16,3317.89 3054.56,3317.89 3054.56,3397.89 3054.56,3585.49 3097.16,3542.89 3202.16,3542.89 3267.16,3607.89 3304.76,3607.89 3379.56,3533.09 3379.56,3522.89 ; 3217.16,2932.89 3227.16,2942.89 3227.16,3352.89 v2(3247.16,3372.89) ; v2(3247.16,3452.89) 3257.16,3442.89 3304.76,3442.89 ; v2(3247.16,3532.89) 3217.16,3502.89 3217.16,3442.89 3272.16,3387.89 3272.16,3277.89 3337.16,3212.89 ; v2(3257.16,3007.89) 3257.16,3032.89 3352.16,3127.89 v2(3357.16,3127.89) ; 3257.16,3522.89 3304.76,3522.89 ; v1(3260,1830) 3380,1950 v1(3380,2105) ; v1(3270,2020) 3320,2070 3320,2105 3360,2145 3450,2145 v1(3490,2185) ; v1(3270,2060) 3270,2095 3360,2185 v1(3425,2185) ; v2(3307.16,3032.89) 3342.16,3032.89 v2(3412.16,3102.89) ; 3317.16,2932.89 3447.16,3062.89 3447.16,3260.49 3527.16,3260.49 ; 3379.56,3442.89 3379.56,3522.89 ; 3379.56,3607.89 3527.16,3607.89 ; 3385.62,3352.89 3497.16,3464.43 3572.16,3464.43 ; 3417.16,2932.89 3467.16,2982.89 3507.16,2982.89 v2(3572.16,3047.89) v2(3572.16,3192.89) ; v2(3437.16,3497.89) 3412.16,3522.89 3379.56,3522.89 ; 3447.16,3335.29 3489.76,3377.89 3592.16,3377.89 3612.16,3357.89 ; v2(3487.16,3577.89) 3497.16,3567.89 3497.16,3531.35 ; v2(3507.16,3027.89) v2(3507.16,3162.89) ; 3527.16,3335.29 v2@3579.56,3335.29 ; 3529.76,3257.89 v2(3582.16,3257.89) 3632.16,3257.89 3692.16,3197.89 3762.16,3197.89 3797.16,3232.89 v2(3797.16,3282.89) 3819.76,3260.29 3922.16,3260.29 ; 3532.16,3612.89 3532.16,3571.35 3572.16,3531.35 ; 3572.16,3472.89 3572.16,3464.43 ; v2(3577.16,3407.89) 3572.16,3412.89 3572.16,3464.43 ; v1(3580,2465) 3610,2465 3740,2595 4115,2595 v1(4200,2510) ; v2(3582.16,3337.89) 3697.16,3222.89 v2(3752.16,3222.89) ; v1(3605,2510) 3715,2620 4135,2620 v1(4200,2555) ; 3622.16,2937.89 v2(3622.16,3227.89) ; v2(3622.16,3347.89) 3612.16,3357.89 ; 3632.16,3612.89 3612.16,3592.89 3612.16,3357.89 ; v2(3637.16,3437.89) 3694.76,3437.89 ; v2(3637.16,3517.89) 3694.76,3517.89 ; v1(3655,2735) 3705,2735 3775,2805 ; 3682.16,3612.89 3769.56,3525.49 ; v1(3710,2365) v1(3710,2500) ; 3769.56,3437.89 3812.16,3480.49 3812.16,3582.89 3782.16,3612.89 ; v2@3832.16,2970.29 3874.76,3012.89 ; v2(3872.16,3202.89) 3904.76,3202.89 ; 3922.16,3330.49 3922.16,3260.29 ; 3922.16,3405.29 3939.56,3387.89 v2(3972.16,3387.89) ; 3939.56,3347.89 v2(3972.16,3347.89) ; 3949.56,2922.89 v2@3992.16,2965.49 ; 3949.56,3012.89 3874.76,2938.09 3874.76,2922.89 v2(3827.16,2922.89) 3807.16,2942.89 3807.16,2987.89 3832.16,3012.89 3832.16,3212.89 3879.56,3260.29 3922.16,3260.29 ; v1(4065,1850) v1(4065,2140) ; v1(4065,2185) 4090,2160 4090,1805 v1(4155,1740) ; v1(4170,2255) 4200,2255 4245,2300 4245,2365 v1(4280,2400) ; v1(4170,2335) 4170,2390 4280,2500 v1(4280,2555) ; 4197.16,3242.89 4231.16,3208.89 4231.16,2996.89 4212.16,2977.89 ; 4197.16,3292.89 4247.16,3242.89 4247.16,3042.89 4312.16,2977.89 ; 4197.16,3342.89 4282.16,3257.89 4282.16,3152.89 4347.16,3087.89 4347.16,3042.89 4412.16,2977.89 ; v1(4210,2315) 4210,2380 v1(4280,2450)
  Bottom Layer w12: v1(2920,1760) 2975,1815 3150,1815 3165,1800 v1(3165,1725) ; v1(3260,1775) 3430,1945 v1(3430,2105)
  Bottom Layer w15: 2960,1680 2980,1680 3030,1730 3080,1730 v1(3090,1740) ; v1(2977.13,1760) v1(3053.9,1760) 3073.9,1780 v1(3135,1780) ; v2(4222.16,3392.89) 4222.16,3457.89 v2(4242.16,3477.89)
  Bottom Layer w20: 4030,2310 4065,2310 4170,2205 v1(4170,2140) ; v1(4170,2095) v1(4170,2140) ; v1(4430,2460) 4430,2400 v1(4170,2140)
  Bottom Layer w30: 3035,2800 3035,2695 3165,2565 v1(3165,2485) v1(3165,2430) 3355,2240 4070,2240 4125,2185 4125,1905 4235,1795 ; 4130,2050 v1(4350,2050) v1(4400,2050)
  Bottom Layer w40: v2(2897.6,2220) 3060,2220 3210,2070 3210,1755 3285,1680 3385,1680 3485,1680 3585,1680 3685,1680 3785,1680
  Bottom Layer w50: v2(2897.6,2220) v2(2897.6,2265.2) 2897.6,2297.6 v1(3055,2455) v1(3055,2505) ; 3135,2800 v1(3245,2690) v1(3375,2690) ; 4235,1680 4235,1795
  other v1: 3985,2315 3315,2690
  other v3: 2956.89,1895.94 3015.94,1895.94 3075,1895.94 2956.89,1955 3015.94,1955 3075,1955

## Polygon pours and split planes (outlines as drawn)
no net on Top Layer "Top Layer-No Net" (solid, pour order 5): 4040,2300 3830,2300 3830,2510 4036.18,2510 4040,2506.18
no net on Top Layer "Top Layer-No Net" (solid, remove dead copper, pour order 11): 2855,2855 4530,2855 4530,1625 2855,1625
no net on Top Layer "Top Layer-No Net" (solid, pour order 8): 4527.16,3667.89 4157.16,3667.89 4157.16,2872.89 4527.16,2872.89
no net on Top Layer "Top Layer-No Net" (solid, pour order 10): 4027.16,3667.89 4027.16,2872.89 2852.16,2872.89 2852.16,3667.89
no net on Bottom Layer "Top Layer-No Net" (solid, pour order 7): 4040,2300 3830,2300 3830,2510 4040,2510
no net on Bottom Layer "Top Layer-No Net" (solid, pour order 13): 2855,2855 4530,2855 4530,1625 2855,1625
no net on Bottom Layer "Top Layer-No Net" (solid, pour order 12): 4027.16,3667.89 4027.16,2872.89 2852.16,2872.89 2852.16,3667.89
no net on Bottom Layer "Top Layer-No Net" (solid, pour order 14): 4527.16,3667.89 4527.16,2872.89 4157.16,2872.89 4157.16,3662.89 4162.16,3667.89

## Keep-outs
Keep-Out Layer:
  the board outline again, w10

## Other copper
Top Layer:
  pour cut-out: 4370,2840 4370,2715 4490,2715 4490,2840
Bottom Layer:
  rectangle: 2900,1870 3135,1975

## Silkscreen, mask and mechanical layers (free items; w line width, h text height)
Top Overlay:
  circle w6: c3230,3595 r20
  circle w6: c3220,2795 r20
  circle w6: c2890,2715 r20
  lines w10: 2870,2875 2905,2875 4030,2875 4030,3660 ; 3205,2855 4515,2855 ; 4160,2910 4160,2875 4515,2875 ; 4160,3405 4160,3660
  text "+" at 3220,3580 h30
  text "+" at 3210,2780 h30
  text "-" at 2880,2700 h30
  text "-" at 3295,1775 h30
  text "-" at 3860,1775 h30
  text "CH5" at 3855,1720 h30
  text "CH1" at 3250,1710 h30
  text "+" at 3860,1665 h30
  text "+" at 3295,1660 h30
  text "MOTO" at 3130,1645 h30

## Text inside footprints (layer, text, board x,y; h text height)
USB_2: Top Overlay "+" at 4332.16,3107.89 h39.37 r90